# EAGLE board CapstoneControllerBoard_V4 (EAGLE 9.2.2)

Size 160 x 84.76 mm. Coordinates in mm from the lower left corner, seen from the top.
Outline: 0,0 160,0 160,84.76 0,84.76 0,0
Copper layers (1*16): Top 0.035mm / dielectric 1.5mm / Bottom 0.035mm
Design rules "default": minimum track width 6mil, minimum drill 0.35mm, track to track 6mil, track to pad 6mil, pad to pad 6mil, via to via 6mil, smd to smd 6mil, copper to edge 40mil, drill to drill 6mil, minimum pad ring 10mil, minimum via ring 8mil, stop-mask expansion 4mil, vias tented up to drill 0mil, thermal gap 10mil

## Footprints (pad centres in the part's own frame; a part is rotated, then mirrored left to right if it is on the bottom)
R0805 = smd 1.3 x 1.5: 1 -0.95,0; 2 0.95,0
0805 = smd 0.8 x 1.2: 1 -0.9,0; 2 0.9,0
C0603 = smd 1.1 x 1: 1 -0.85,0; 2 0.85,0
A122645-ND = drill 1 square: P$1 3.58,2.54 | drill 1: P$2 2.56,4.32; P$3 1.54,2.54; P$4 0.52,4.32; P$5 -0.5,2.54; P$6 -1.52,4.32; P$7 -2.54,2.54; P$8 -3.56,4.32; P$9 -6.86,9.14; P$10 -4.57,9.14; P$11 4.57,9.14; P$12 6.86,9.14 | drill 1.8: P$13 -8.13,3.43; P$14 8.13,3.43 | hole 3.25: -6.35,0; 6.35,0
DO41-7.6 = drill 1.1 pad 1.7: A 3.81,0; C -3.81,0
1734723-1_RJ11 = drill 1 square: 1 -2.54,2.54 | drill 1: 2 0,2.54; 3 2.54,2.54; 4 -3.81,0; 5 -1.27,0; 6 1.27,0 | drill 1.65: SH1 -7.5,-9.4; SH2 6.22,-9.4 | hole 3.3: -5.72,-6.35; 4.44,-6.35
AVRISP-BOX = drill 0.9 pad 1.626: 1 -1.397,2.54; 2 1.397,2.54; 3 -1.143,0; 4 1.143,0; 5 -1.397,-2.54; 6 1.397,-2.54
TE_3-641208-5 = drill 1.78 square: 1 -7.92,0 | drill 1.78: 2 -3.96,0; 3 0,0; 4 3.96,0; 5 7.92,0
TRIM_POT = drill 0.7 square: 1 -2.5,0; 2 0,2.5; 3 2.5,0
PDIP-T28 = drill 0.813 pad 1.2: 1 -16.51,-3.81; 2 -13.97,-3.81; 3 -11.43,-3.81; 4 -8.89,-3.81; 5 -6.35,-3.81; 6 -3.81,-3.81; 7 -1.27,-3.81; 8 1.27,-3.81; 9 3.81,-3.81; 10 6.35,-3.81; 11 8.89,-3.81; 12 11.43,-3.81; 13 13.97,-3.81; 14 16.51,-3.81; 15 16.51,3.81; 16 13.97,3.81; 17 11.43,3.81; 18 8.89,3.81; 19 6.35,3.81; 20 3.81,3.81; 21 1.27,3.81; 22 -1.27,3.81; 23 -3.81,3.81; 24 -6.35,3.81; 25 -8.89,3.81; 26 -11.43,3.81; 27 -13.97,3.81; 28 -16.51,3.81
TO92 = drill 0.813 octagon: 1 -1.27,0; 2 0,1.905; 3 1.27,0
057-040-1 = drill 1 octagon: 1 -24.13,-1.27; 2 -24.13,1.27; 3 -21.59,-1.27; 4 -21.59,1.27; 5 -19.05,-1.27; 6 -19.05,1.27; 7 -16.51,-1.27; 8 -16.51,1.27; 9 -13.97,-1.27; 10 -13.97,1.27; 11 -11.43,-1.27; 12 -11.43,1.27; 13 -8.89,-1.27; 14 -8.89,1.27; 15 -6.35,-1.27; 16 -6.35,1.27; 17 -3.81,-1.27; 18 -3.81,1.27; 19 -1.27,-1.27; 20 -1.27,1.27; 21 1.27,-1.27; 22 1.27,1.27; 23 3.81,-1.27; 24 3.81,1.27; 25 6.35,-1.27; 26 6.35,1.27; 27 8.89,-1.27; 28 8.89,1.27; 29 11.43,-1.27; 30 11.43,1.27; 31 13.97,-1.27; 32 13.97,1.27; 33 16.51,-1.27; 34 16.51,1.27; 35 19.05,-1.27; 36 19.05,1.27; 37 21.59,-1.27; 38 21.59,1.27; 39 24.13,-1.27; 40 24.13,1.27
IC3 = drill 1.397 long: 1 -5.08,2.54; 1A -5.08,-2.54; 2 0,2.54; 2A 0,-2.54; 3 5.08,2.54; 3A 5.08,-2.54
HC49US = drill 0.7 pad 1.651: 1 -2.54,0; 2 2.54,0

## Placement (x,y rotation side)
1  710  [R0805]  -27.94,102.87 0 top  (outside the outline)
2  710  [R0805]  -33.02,102.87 0 top  (outside the outline)
415  [R0805]  -16.51,109.22 0 top  (outside the outline)
C1  0.1uF  [0805]  -25.4,109.22 0 top  (outside the outline)
C2  0.1uF  [0805]  -29.21,109.22 0 top  (outside the outline)
C3  0.1uF  [0805]  -33.02,109.22 0 top  (outside the outline)
C4  0.1uF  [0805]  -36.83,109.22 0 top  (outside the outline)
C5  0.1uF  [0805]  -40.64,109.22 0 top  (outside the outline)
C6  0.1uF  [0805]  -44.45,109.22 0 top  (outside the outline)
C7  0.1uF  [0805]  -48.26,109.22 0 top  (outside the outline)
C8  0.1uF  [0805]  -52.07,109.22 0 top  (outside the outline)
C9  10uF  [C0603]  -39.37,102.87 0 top  (outside the outline)
C10  0.1uF  [0805]  -55.88,109.22 0 top  (outside the outline)
C11  22pF  [C0603]  -45.72,102.87 0 top  (outside the outline)
C12  22pF  [C0603]  -52.07,102.87 0 top  (outside the outline)
C13  0.1uF  [0805]  -59.69,109.22 0 top  (outside the outline)
C14  0.1uF  [0805]  -63.5,109.22 0 top  (outside the outline)
C15  10uF  [C0603]  -58.42,102.87 0 top  (outside the outline)
C16  10uF  [C0603]  -64.77,102.87 0 top  (outside the outline)
C17  10uF  [C0603]  -71.12,102.87 0 top  (outside the outline)
CONTROLLER2  ETHERNET  [A122645-ND]  133.35,7.62 0 top
D3  3.3V Zener  [DO41-7.6]  -59.69,93.98 0 top  (outside the outline)
D4  3.3V Zener  [DO41-7.6]  -72.39,93.98 0 top  (outside the outline)
E1  TEMP_SENSOR_2  [1734723-1_RJ11]  123.19,69.85 180 top
E2  TEMP_SENSOR_1  [1734723-1_RJ11]  142.24,69.85 180 top
FANS  ETHERNET  [A122645-ND]  45.72,6.35 0 top
FRAME2  FRAME-LETTERNO_PACKAGE  [DUMMY]  -19.05,114.3 0 top  (outside the outline)
ISP  AVRISP-BOX  [AVRISP-BOX]  88.9,5.08 90 top
J1  3-641208-5  [TE_3-641208-5]  17.78,78.74 0 top
R1  [R0805]  -21.59,109.22 0 top  (outside the outline)
R2  2.4k  [0805]  -67.31,109.22 0 top  (outside the outline)
R3  1.2k  [0805]  -71.12,109.22 0 top  (outside the outline)
R4  0-5k  [TRIM_POT]  -39.37,80.01 0 top  (outside the outline)
R5  5k  [0805]  -74.93,109.22 0 top  (outside the outline)
R6  16k  [0805]  -78.74,109.22 0 top  (outside the outline)
R7  1.3k  [0805]  -82.55,109.22 0 top  (outside the outline)
R8  0-5k  [TRIM_POT]  -46.99,80.01 0 top  (outside the outline)
R9  5k  [0805]  -15.24,114.3 0 top  (outside the outline)
U3  ATmega328P PDIP  [PDIP-T28]  88.9,33.02 90 top
U$2  DS18B  [TO92]  137.16,48.26 0 top
X2  057-040-1  [057-040-1]  36.83,66.04 0 top
X3  IC3  [IC3]  86.36,71.12 180 top
Y2  [HC49US]  104.14,38.1 270 top

## Library data of the parts
1 2 415 R1 = rcl; SPICEPREFIX: R
C1-C8 C10 C13 C14 = SparkFun-Capacitors; PROD_ID: CAP-11625
C9 C11 C12 C15-C17 ISP = adafruit
CONTROLLER2 FANS = ETHERNET-3
D3 D4 R4 R8 U3 = CustomLibrary
E1 E2 = 5555140-6 RJ11
FRAME2 = SparkFun-Aesthetics; DESIGNER: Ben Vandenberg; REV: 0.0; VERSION: v01
J1 = 3-641208-5; AVAILABILITY: Unavailable; COMMENT: 3-641208-5; DESCRIPTION: MTA-156 Series, 3.96mm Pitch 5 Way 1 RowStraight PCB Header, Solder Term, 7A; EU_ROHS_COMPLIANCE: Compliant; MF: TE Connectivity; MP: 3-641208-5; PACKAGE: None; PRICE: None; TE_PURCHASE_URL: https://www.te.com/usa-en/product-3-641208-5.html?te_bu=Cor&te_type=disp&te_campaign=seda_glo_cor-seda-global-disp-prtnr-fy19-seda-model-bom-cta_sma-317_1&elqCampaignId=32493
R2 R3 R5-R7 R9 = SparkFun-Resistors; PROD_ID: RES-11622
U$2 = temperatureboardElizabeth
X2 = con-panduit; OC_FARNELL: unknown; OC_NEWARK: unknown
X3 = con-phoenix-508; OC_FARNELL: unknown; OC_NEWARK: unknown
Y2 = SparkFun-FreqCtrl

## Nets
3.3V: C5.1 C9.1 C10.1 C16.1 E1.5 E2.5 U3.7 U3.20 X2.1 X2.17
3.3V1: CONTROLLER2.P$1
3.3V_RETURN: CONTROLLER2.P$2 CONTROLLER2.P$3
12V: C2.1 C7.1 C15.1 FANS.P$3 R2.2 X3.1A
46V: CONTROLLER2.P$7 R6.2
+5V: C1.2 C3.2 C4.1 C6.1 C17.1 J1.5 X3.3A
AIR_STARVE_RELAY: 2.2 CONTROLLER2.P$5 U3.13
DQ_1: E2.4 X2.29
DQ_2: E1.4 X2.31
DQ_3: R1.2 U$2.2
EXTRA_PIN_1: FANS.P$8 X2.19
EXTRA_PIN_2: FANS.P$7 X2.21
EXTRA_PIN_3: X2.23
FAN_PWM: 415.1 FANS.P$1 X2.33
FAN_PWM_ATMEL: 1.1 FANS.P$5
FUEL_CELL_CURRENT1: CONTROLLER2.P$6 U3.23
GATE_SIG: CONTROLLER2.P$4 U3.16
GND: C1.1 C2.2 C3.1 C4.2 C5.2 C6.2 C7.2 C8.2 C9.2 C10.2 C11.2 C12.2 C13.2 C14.2 C15.2 C16.2 C17.2 CONTROLLER2.P$8 CONTROLLER2.P$13 CONTROLLER2.P$14 D3.A D4.A E1.3 E1.SH1 E1.SH2 E2.3 E2.SH1 E2.SH2 FANS.P$2 FANS.P$6 FANS.P$13 FANS.P$14 ISP.6 J1.1 R3.1 R7.1 U3.8 U3.22 U$2.1 X2.9 X2.25 X2.39 X3.2A
LOAD_ENABLE: U3.4 X2.37
N$1: C8.1 U3.21
N$2: ISP.1 U3.18
N$3: ISP.3 U3.19
N$4: R8.3
N$5: R4.3
N$6: 415.2
N$7: R2.1 R4.1
N$8: 1.2 U3.12
N$9: 2.1
N$10: R6.1 R8.1
N$11: R3.2 R4.2 R5.2
N$12: ISP.4 U3.17
N$13: C11.1 U3.9 Y2.2
N$14: C12.1 U3.10 Y2.1
N$15: R7.2 R8.2 R9.2
RESET: ISP.5 U3.1
SCALED_BATT_V: C13.1 D3.C R5.1 U3.25
SCALED_FUEL_CELL_V: C14.1 D4.C R9.1 U3.24
SCL: U3.28 X2.5
SDA: U3.27 X2.3
VCC: ISP.2
VDD: R1.1 U$2.3
WARNING_LED: FANS.P$4

## Tracks (layer width: path | path; a pad name or v marks a point on that pad's centre or on a via)
3.3V  (9 unrouted)
3.3V_RETURN  (1 unrouted)
12V  (5 unrouted)
46V  (1 unrouted)
+5V  (6 unrouted)
AIR_STARVE_RELAY  (2 unrouted)
DQ_1  (1 unrouted)
DQ_2  (1 unrouted)
DQ_3  (1 unrouted)
EXTRA_PIN_1  (1 unrouted)
EXTRA_PIN_2  (1 unrouted)
FAN_PWM  (2 unrouted)
FAN_PWM_ATMEL  (1 unrouted)
FUEL_CELL_CURRENT1  (1 unrouted)
GATE_SIG  (1 unrouted)
GND  (42 unrouted)
LOAD_ENABLE  (1 unrouted)
N$1  (1 unrouted)
N$2  (1 unrouted)
N$3  (1 unrouted)
N$7  (1 unrouted)
N$8  (1 unrouted)
N$10  (1 unrouted)
N$11  (2 unrouted)
N$12  (1 unrouted)
N$13  (2 unrouted)
N$14  (2 unrouted)
N$15  (2 unrouted)
RESET  (1 unrouted)
SCALED_BATT_V  (3 unrouted)
SCALED_FUEL_CELL_V  (3 unrouted)
SCL  (1 unrouted)
SDA  (1 unrouted)
VDD  (1 unrouted)